# Altium PCB rgb_pcb.PcbDoc
Units mil, origin at the board's own origin, x right, y up, seen from the top; angles counter-clockwise.
Board outline 3890 x 2150 mil, 2 copper layers (Top Layer, Bottom Layer); 31 components, 23 nets, 101 pads, 0 vias.
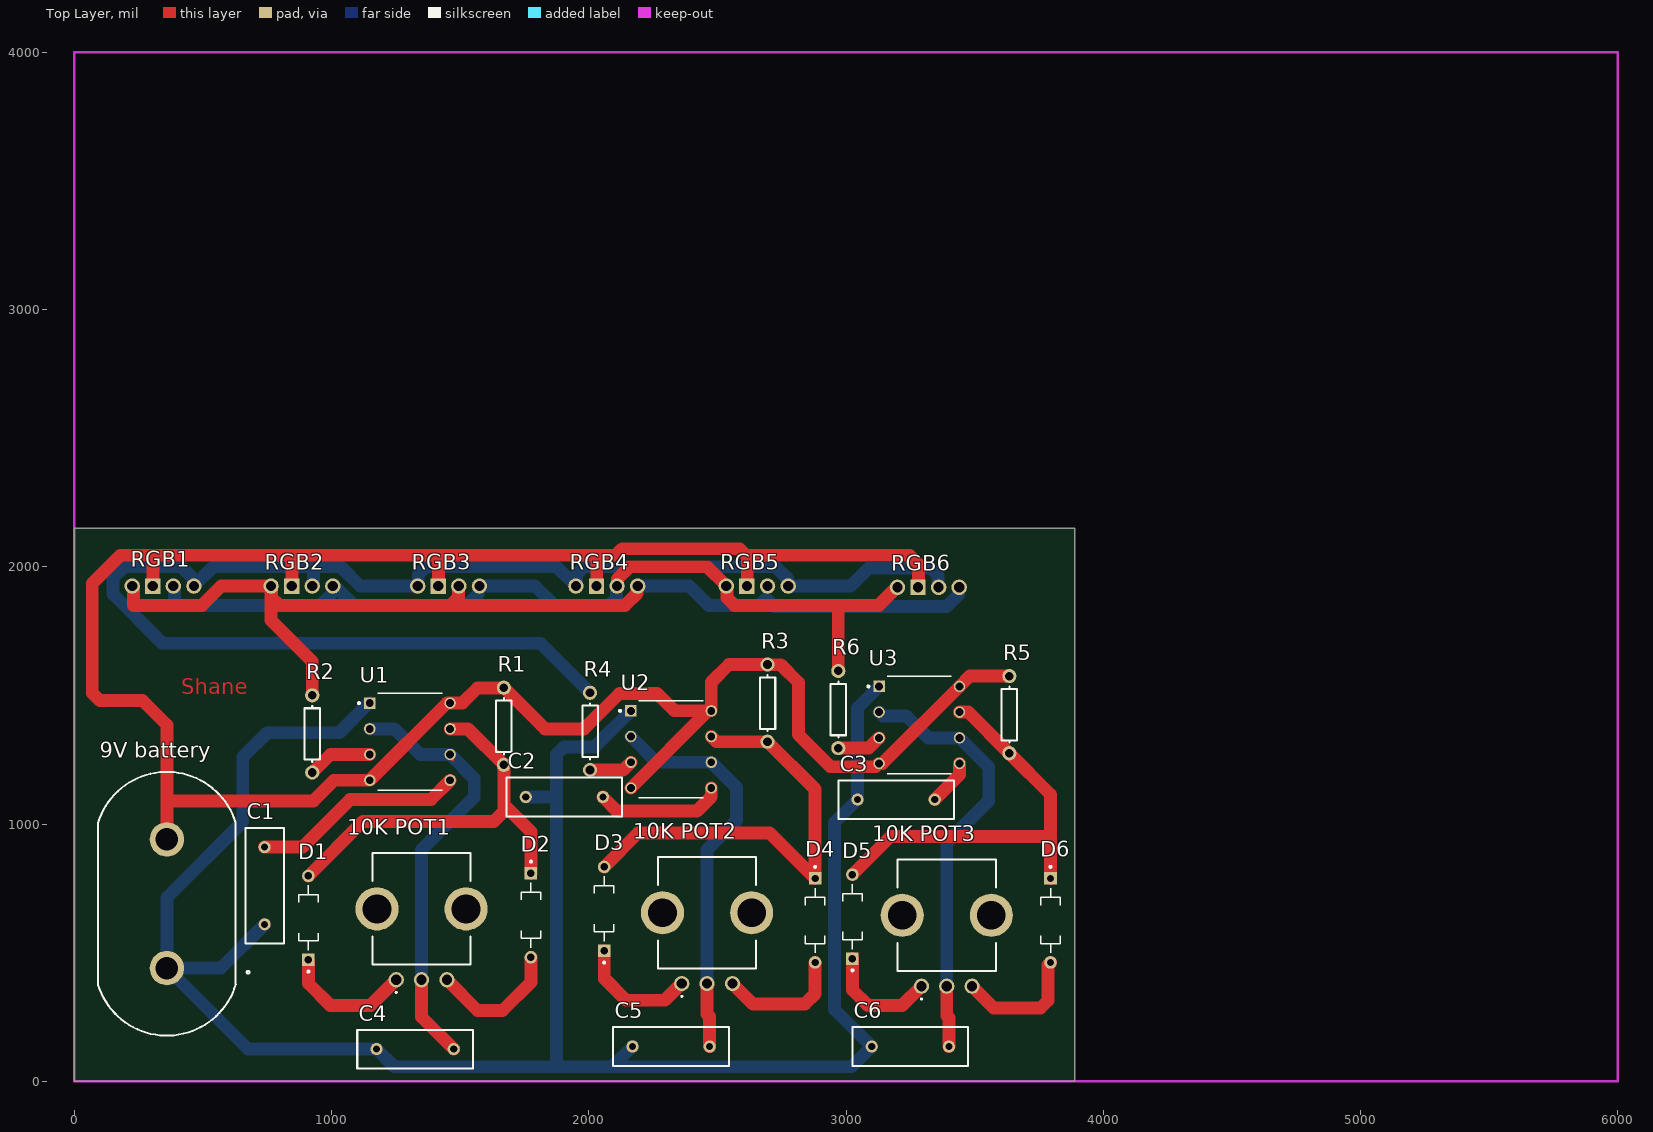
[diagram p0: Top Layer view]
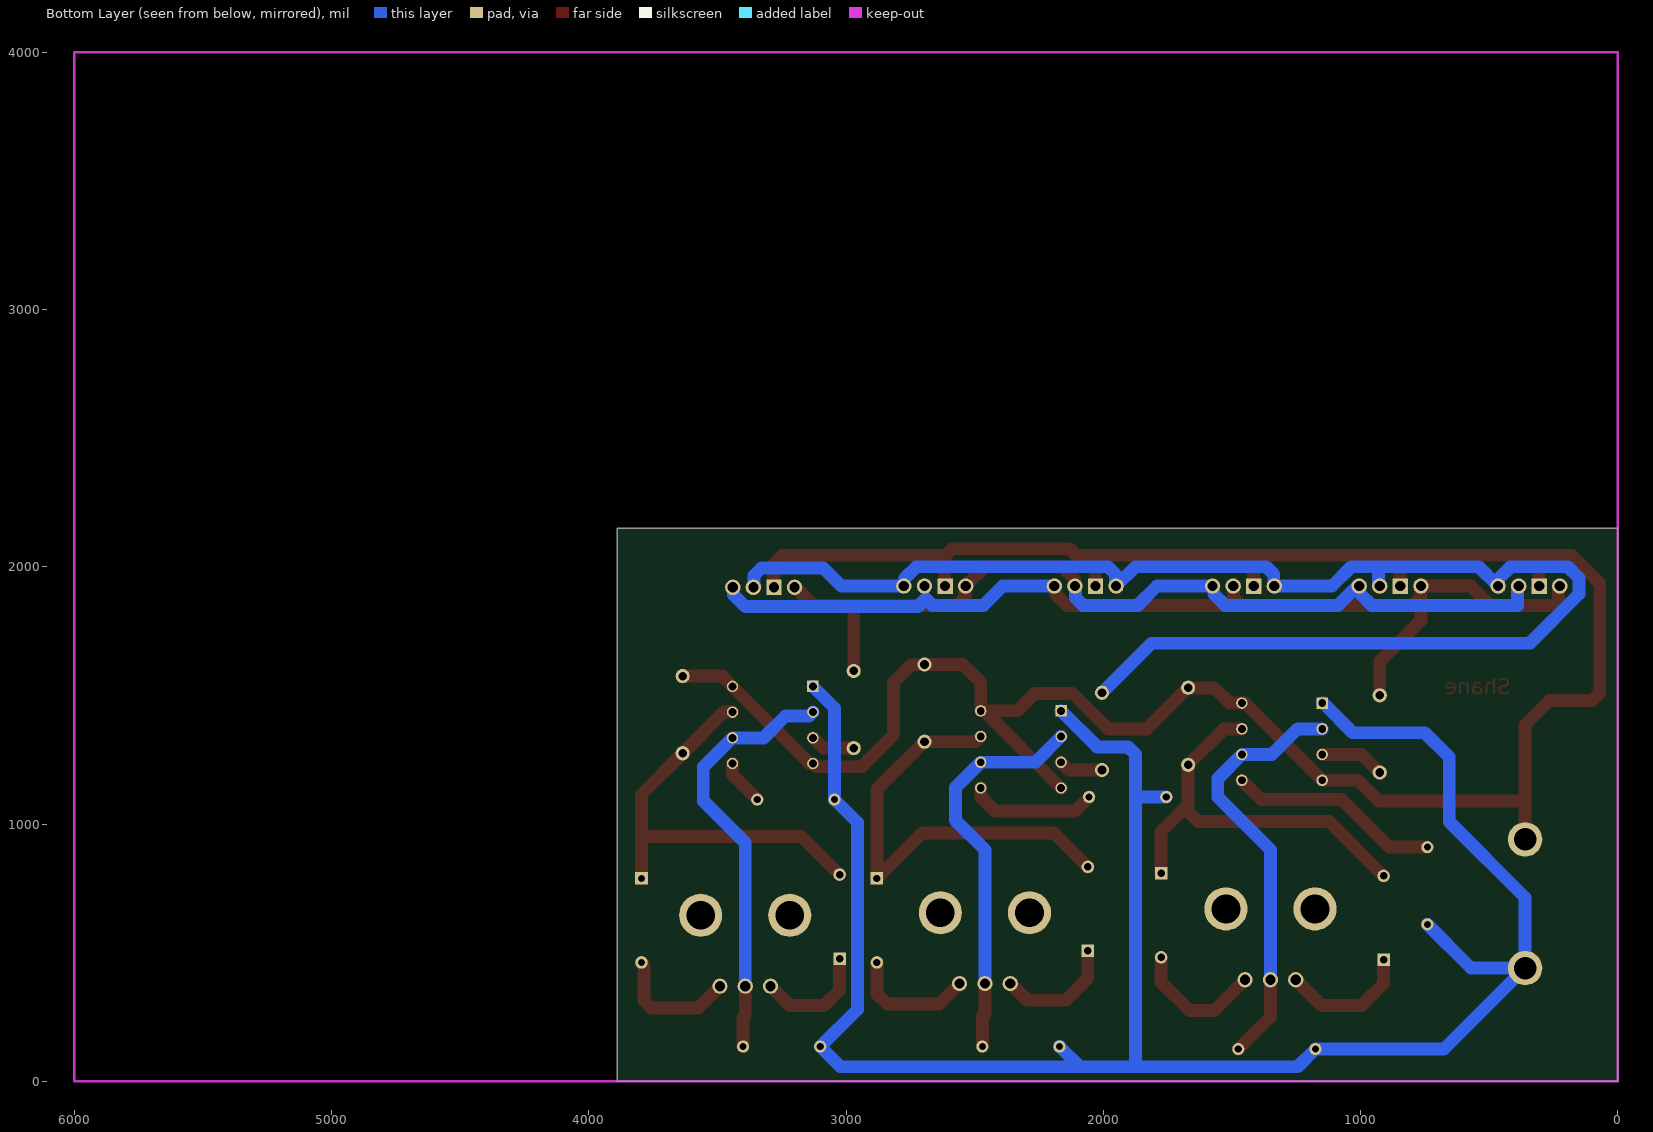
[diagram p1: Bottom Layer view, seen from below]

## Layer stack, top to bottom
Top Solder: solder mask 0.4, Solder Resist, Dk 3.5
Top Layer: signal copper 1.4
Dielectric 1: dielectric 12.6, FR-4, Dk 4.8
Bottom Layer: signal copper 1.4
Bottom Solder: solder mask 0.4, Solder Resist, Dk 3.5

## Board outline
0,0 3890,0 3890,2150 0,2150

## Design rules (kind name [scope] priority, off if disabled: settings)
BoardOutlineClearance [All] p1: gap=12 ignorepadtopadclearanceinfootprint=FALSE
Clearance [All] p1: gap=20 ignorepadtopadclearanceinfootprint=TRUE except(24: Arc-Via Track-Via SMDPad-Via THPad-Via Via-Via Via-Fill Via-Poly Via-Region Via-Text Via-Hole)
DiffPairsRouting [All] p1: maxlimit=10 minlimit=7 mostfreqgap=10 toplayer_minwidth=6 toplayer_maxwidth=15 toplayer_prefwidth=8 bottomlayer_minwidth=6 bottomlayer_maxwidth=15 bottomlayer_prefwidth=8 maxuncoupledlength=500
HoleSize [All] p1: absolutevalues=TRUE maxlimit=1000 minlimit=39.37 maxpercent=80.000 minpercent=20.000
HoleToHoleClearance [All] p1: gap=17 allowstackedmicrovias=TRUE
MinimumAnnularRing [All] p1: minimumring=17
PolygonConnect [All] p1: connectstyle=Relief reliefconductorwidth=10 reliefentries=4 polygonreliefangle="90 Angle" airgapwidth=10
RoutingVias [All] p1: holewidth=30 width=35 viastyle="Through Hole" minholewidth=10 minwidth=11 maxholewidth=255 maxwidth=250
SilkToSilkClearance [All] p1: silktosilkclearance=0
SolderMaskExpansion SolderMaskExpansion_1 [All] p1: expansion=4 istentingtop=FALSE
Width [All] p1: maxlimit=10000 minlimit=30 preferedwidth=50 minimp=50.000000 maximp=50.000000 favimp=50.000000
26 further rules are at their usual default settings.

## Components (designator, comment, footprint, x,y, rotation, side; value= is the part's Value field where it differs from the comment)
"9V battery" "967" 967 360,690 r90 top
"10K POT1" "PTV09A-4030F-B103" PTV09A4030FB103 1350,670 r0 top
"10K POT2" "PTV09A-4030F-B103" PTV09A4030FB103 2460,655 r0 top
"10K POT3" "PTV09A-4030F-B103" PTV09A4030FB103 3391.77,645 r0 top
C1 "Cap" RAD-0.3 740,760 r90 top value=.01uF
C2 "Cap" RAD-0.3 1905,1105 r0 top value=.01uF
C3 "Cap" RAD-0.3 3195,1095 r0 top value=.01uF
C4 "Cap" RAD-0.3 1325,125 r0 top value=.1uF
C5 "Cap" RAD-0.3 2320,135 r0 top value=.1uF
C6 "Cap" RAD-0.3 3250,135 r0 top value=.1uF
D1 "1N4148" DIOAD829W49L456D191 910,635 r90 top
D2 "1N4148" DIOAD829W49L456D191 1775,645 r270 top
D3 "1N4148" DIOAD829W49L456D191 2060,670 r90 top
D4 "1N4148" DIOAD829W49L456D191 2880,625 r270 top
D5 "1N4148" DIOAD829W49L456D191 3025,640 r90 top
D6 "1N4148" DIOAD829W49L456D191 3795,625 r270 top
R1 "Res1" AXIAL-0.3 1670,1380 r90 top value=1K
R2 "Res1" AXIAL-0.3 925,1350 r90 top value=220e
R3 "Res1" AXIAL-0.3 2695,1470 r90 top value=1K
R4 "Res1" AXIAL-0.3 2005,1360 r90 top value=220e
R5 "Res1" AXIAL-0.3 3635,1425 r90 top value=1K
R6 "Res1" AXIAL-0.3 2970,1445 r90 top value=220e
RGB1 "RGB CA" "RGB CA" 345,1925 r180 top
RGB2 "RGB CA" "RGB CA" 885,1925 r180 top
RGB3 "RGB CA" "RGB CA" 1455,1925 r180 top
RGB4 "RGB CA" "RGB CA" 2070,1925 r180 top
RGB5 "RGB CA" "RGB CA" 2655,1925 r180 top
RGB6 "RGB CA" "RGB CA" 3320,1920 r180 top
U1 "NE555P" DIP794W45P254L959H508Q8 1305,1320 r0 top
U2 "NE555P" DIP794W45P254L959H508Q8 2320,1290 r0 top
U3 "NE555P" DIP794W45P254L959H508Q8 3285,1385 r0 top

## Footprints (in the part's own frame and the unit in brackets; to place one, negate y for a bottom-side part, rotate by r counter-clockwise, add the part's x,y. Pads: shape width x height; smd on the part's side, far side on the other; paste and mask are expansions set on the pad)
967 [mm]
  round 3.4 hole 2.23: 1(-6.35,0) 2(6.35,0)
  silkscreen extent -13.02,-8.17 13.02,6.8
AXIAL-0.3 [mm] "Axial Device, Thru-Hole; 2 Leads; 0.3 in Pin Spacing"
  round 1.4 hole 0.85: 1(-3.81,0) 2(3.81,0)
  silkscreen extent -2.77,-0.76 2.77,0.76
DIOAD829W49L456D191 [mm]
  round 1.238 hole 0.73: A(4.146,0)
  rect 1.238x1.238 hole 0.73: C(-4.146,0)
  silkscreen extent -5.4,-0.96 3.2,0.96
DIP794W45P254L959H508Q8 [mm]
  rect 1.13x1.13 hole 0.78: 1(-3.97,3.81)
  round 1.13 hole 0.78: 2(-3.97,1.27) 3(-3.97,-1.27) 4(-3.97,-3.81) 5(3.97,-3.81) 6(3.97,-1.27) 7(3.97,1.27) 8(3.97,3.81)
  silkscreen extent -5.13,-4.79 3.17,4.79
PTV09A4030FB103 [mm]
  round 1.5 hole 1: 1(-2.5,-7) 2(0,-7) 3(2.5,-7)
  round 4.26 hole 2.84: MH1(-4.4,0) MH2(4.4,0)
  silkscreen extent -4.85,-8.3 4.85,5.5, body extent -5.71,-7.4 5.72,5.5, height 30.6
RAD-0.3 [mm] "Radial Cap, Thru-Hole; 2 Leads; 0.3 in Pin Spacing"
  round 1.2 hole 0.7: 1(-3.81,0) 2(3.81,0)
  silkscreen extent -5.71,-1.91 5.71,1.91
"RGB CA" [mil]
  rect 60x60 hole 40: a(40,0)
  round 60 hole 40: b(-40,0) g(-120,0) r(120,0)

## Part data
"9V battery": "Undefined or Miscellaneous", Manufacturer_Name="Keystone Electronics", Mouser2 Part Number=534-967, Datasheet Link=https://componentsearchengine.com//967.pdf, Manufacturer_Part_Number=967, Mouser2 Price/Stock=https://www.mouser.com/Search/Refine.aspx?Keyword=534-967
"10K POT1" "10K POT2" "10K POT3": "Variable Resistor", Manufacturer_Name=Bourns, Mouser2 Part Number=652-PTV09A4030FB103, Datasheet Link=https://componentsearchengine.com//PTV09A-4030F-B103.pdf, Height=30.5mm, Manufacturer_Part_Number=PTV09A-4030F-B103, Mouser2 Price/Stock=https://www.mouser.com/Search/Refine.aspx?Keyword=652-PTV09A4030FB103
C1 C2 C3 C4 C5 C6: "Capacitor", LatestRevisionDate=17-Jul-2002, LatestRevisionNote="Re-released for DXP Platform.", PackageDescription="Radial Cap, Thru-Hole; 2 Leads; 0.3 in Pin Spacing", PackageReference=RAD-0.3, Published=8-Jun-2000, Publisher="Altium Limited"
D1 D2 D3 D4 D5 D6: "DIODE FAST SIGNAL 500MA/100V", Package="DO-35 Fairchild Semiconductor", Availability=Unavailable, MF="MICROSS/On Semiconductor", MP=1N4148, Price=None, SnapEDA_Link=https://www.snapeda.com/parts/1N4148/MICROSS/On%20Semiconductor/view-part/9246/?ref=snap
R1 R2 R3 R4 R5 R6: "Resistor", LatestRevisionDate=17-Jul-2002, LatestRevisionNote="Re-released for DXP Platform.", PackageDescription="Axial Device, Thru-Hole; 2 Leads; 0.3 in Pin Spacing", PackageReference=AXIAL-0.3, Published=8-Jun-2000, Publisher="Altium Limited"
RGB1 RGB2 RGB3 RGB4 RGB5 RGB6: library part "rgb ca"
U1 U2 U3: "Single Precision Timer", Package="PDIP-8 Texas Instruments", Arrow_Electronics-Purchase-URL=https://snapeda.com/shop?store=Arrow+Electronics&id=2776400, DigiKey-Purchase-URL=https://snapeda.com/shop?store=DigiKey&id=2776400, MF="Texas Instruments", Mouser-Purchase-URL=https://snapeda.com/shop?store=Mouser&id=2776400, MP=NE555P, SnapEDA_Link=https://www.snapeda.com/parts/NE555P/Texas%20Instruments/view-part/2776400/?ref=snap, Texas_Instruments-Purchase-URL=https://snapeda.com/shop?store=Texas+Instruments&id=2776400

## Nets (pads, with @x,y where several pads share a name; then routed paths per layer and width w, separated by ;. In a path a pad name is that pad's centre, name@x,y a point inside that pad or via, vN(x,y) a via of type N, cw(c..) or ccw(c..) an arc to the next point about the centre after c; other vN are vias at no path point)
GND: "9V battery.1" C1.1 C2.1 C3.1 C4.1 C5.1 C6.1 U1.1 U2.1 U3.1 | length 8244.7
  Bottom Layer w50: C1.1 570,440 360,440 ; U1.1 1145,1470 1030,1355 750,1355 655,1260 655,1008.85 360,713.85 360,440 ; C2.1 1870,1105 1875,1110 ; U2.1 2023.7,1300 1904.29,1300 1875,1270.71 1875,1110 ; C5.1 2091.38,56.38 ; U3.1 3045,1451.3 C3.1 2955.63,1005.63 2955.63,279.37 C6.1 3021.38,56.38 2091.38,56.38 ; 360,440 675,125 C4.1 1243.62,56.38 1870,56.38 ; 1870,56.38 2091.38,56.38 ; 1870,56.38 1875,61.38 1875,1110
"Net9V battery_2": "9V battery.2" R1.2 R3.2 R5.2 RGB1.a RGB2.a RGB3.a RGB4.a RGB5.a RGB6.a U1.4 U1.8 U2.4 U2.8 U3.4 U3.8 | length 9798.5
  Top Layer w50: RGB1.a@306.29,1926.29 306.29,2045 ; 360,940 360,1100 ; RGB2.a@846.29,1926.29 846.29,2040 841.29,2045 ; RGB3.a@1416.29,1926.29 1416.29,2045 ; RGB4.a@2031.29,1926.29 2031.29,2040 2036.29,2045 ; U2.4 U2.8@2463.7,1440 ; RGB5.a@2616.29,1926.29 2616.29,2040 2611.29,2045 ; RGB6.a@3281.29,1921.29 3281.29,2010 3246.29,2045 2611.29,2045 ; R5.2 3481.3,1575 U3.8 3141.3,1235 U3.4 3127.7,1235 3115.14,1222.44 2939.95,1222.44 2815,1347.39 2815,1550 2745.98,1619.02 2695.98,1619.02 R3.2 2545,1620 2476.3,1551.3 U2.8 U2.8@2463.7,1440 ; 306.29,2045 841.29,2045 ; 306.29,2045 180,2045 70,1935 70,1509.29 99.29,1480 265,1480 360,1385 360,1100 ; 360,1100 370,1090 930,1090 1010,1170 U1.4 1448.7,1470 U1.8 1508.61,1470 1567.64,1529.02 1669.02,1529.02 R1.2 1830,1370 1981.85,1370 2119.09,1507.24 2265.94,1507.24 2333.18,1440 U2.8@2463.7,1440 ; 841.29,2045 1416.29,2045 ; 1416.29,2045 2036.29,2045 ; 2036.29,2045 2104.94,2045 2129.94,2070 2586.29,2070 2611.29,2045
"Net10K POT1_1": "10K POT1.1" D1.C | length 509.7
  Top Layer w50: D1.C 910,380 995,295 1152.17,295 1251.57,394.41
"Net10K POT1_2": "10K POT1.2" C4.2 U1.2 U1.6 | length 1700.9
  Top Layer w10: U1.6 1461.3,1260.67 1471.99,1249.98 1471.99,1248.01
  Top Layer w50: 1350,394.41 1350,250 C4.2
  Bottom Layer w50: U1.2 1245,1370 1345,1270 U1.6 1555,1176.3 1555,1105 1350,900 1350,394.41
"Net10K POT1_3": "10K POT1.3" D2.A | length 518.4
  Top Layer w50: 1448.43,394.41 1567.83,275 1665,275 1775,385 D2.A
"Net10K POT2_1": "10K POT2.1" D3.C | length 470.2
  Top Layer w50: D3.C 2060,400 2145,315 2295,315 2359.41,379.41 2361.57,379.41
"Net10K POT2_2": "10K POT2.2" C5.2 U2.2 U2.6 | length 1551.7
  Top Layer w50: 2460,379.41 2460,260.98 2470,250.98 C5.2
  Bottom Layer w50: U2.2 2263.7,1240 U2.6 2575,1141.3 2575,1015 2460,900 2460,379.41
"Net10K POT2_3": "10K POT2.3" D4.A | length 492.8
  Top Layer w50: 2558.43,379.41 2637.83,300 2840,300 2880,340 D4.A
"Net10K POT3_1": "10K POT3.1" D5.C | length 445.8
  Top Layer w50: D5.C 3025,355 3085,295 3218.94,295 3293.35,369.41
"Net10K POT3_2": "10K POT3.2" C6.2 U3.2 U3.6 | length 1672.1
  Top Layer w50: 3391.77,369.41 3391.77,255.09 3400,246.87 C6.2
  Bottom Layer w50: U3.2 3143.7,1420 3235,1420 3320,1335 U3.6 3555,1221.3 3555,1090 3391.77,926.77 3391.77,369.41
"Net10K POT3_3": "10K POT3.3" D6.A | length 493.5
  Top Layer w50: 3490.2,369.41 3574.61,285 3755.71,285 3785,314.29 3785,451.77 D6.A
NetC1_2: C1.2 U1.5 | length 829
  Top Layer w50: C1.2 887.5,910 1072.5,1095 1386.3,1095 U1.5
NetC2_2: C2.2 U2.5 | length 501.1
  Top Layer w50: C2.2 2110,1050 2420,1050 2476.3,1106.3 U2.5
NetC3_2: C3.2 U3.5 | length 179.9
  Top Layer w50: C3.2 3441.3,1191.3 U3.5
NetD1_A: D1.A D2.C R1.1 U1.7 | length 1621.7
  Top Layer w50: D1.A 1121.77,1010 1630.71,1010 1670,1049.29 1670,1075 ; U1.7 1530,1370 R1.1 1670,1075 ; D2.C 1775,970 1670,1075
NetD3_A: D3.A D4.C R3.1 U2.7 | length 1783.2
  Top Layer w50: D3.A 2191.77,965 2703.23,965 D4.C 2880,1135 R3.1 2496.3,1320 U2.7
NetD5_A: D5.A D6.C R5.1 U3.7 | length 1644.5
  Top Layer w50: D5.A 3173.39,951.61 3795,951.61 ; U3.7 3475,1435 R5.1 3795,1115 3795,951.61 ; D6.C 3795,951.61
NetR2_1: R2.1 U1.3 | length 252.7
  Top Layer w50: R2.1 926.38,1200 996.38,1270 U1.3
NetR2_2: R2.2 RGB1.r RGB2.r RGB3.b RGB4.g RGB5.b RGB6.g | length 4115.5
  Top Layer w50: RGB1.r 230,1925 230,1850 496.07,1850 571.07,1925 RGB2.r ; R2.2 925,1631.84 765,1791.84 RGB2.r ; RGB3.b 1493.09,1923.09 1493.09,1879.45 1463.64,1850 ; RGB4.g 2188.09,1923.09 2188.09,1897.02 2141.07,1850 1463.64,1850 ; RGB6.g@3439.37,1918.09 RGB6.g@3440,1918.71 ; RGB2.r 766.91,1923.09 766.91,1879.45 796.36,1850 1463.64,1850
  Bottom Layer w50: RGB3.b RGB3.b@1500,1925 ; RGB4.g@2185,1925 RGB4.g 2390.67,1925 2465.67,1850 2663.64,1850 2690,1876.36 2721.36,1845 3391.07,1845 3438.09,1892.02 3438.09,1918.09 RGB6.g
NetR4_1: R4.1 U2.3 | length 171.1
  Top Layer w50: R4.1 2133.7,1210 U2.3
NetR4_2: R4.2 RGB1.g RGB2.b RGB3.r RGB4.r RGB5.g RGB6.b | length 5743.7
  Top Layer w50: RGB2.b@924.37,1923.09 RGB2.b@925,1923.71 ; RGB6.b@3358.22,1916.93 RGB6.b@3360,1918.71
  Bottom Layer w50: RGB2.b 930,1925 930,2000 ; R4.2 1812.54,1702.46 341.48,1702.46 150,1893.93 150,1956.07 193.93,2000 416.07,2000 463.09,1952.98 463.09,1926.91 RGB1.g 540,2000 930,2000 ; RGB5.g@2773.09,1952.98 2726.07,2000 1981.36,2000 1951.91,1970.55 1951.91,1926.91 RGB4.r 1875,2000 1366.36,2000 1336.91,1970.55 1336.91,1926.91 RGB3.r 1111.07,1925 1036.07,2000 930,2000 ; RGB5.g 3018.17,1925 3088.17,1995 3328.64,1995 3358.09,1965.55 3358.09,1921.91 RGB6.b
NetR6_1: R6.1 U3.3 | length 175.3
  Top Layer w50: R6.1 3088.7,1295 U3.3
NetR6_2: R6.2 RGB1.b RGB2.g RGB3.g RGB4.b RGB5.r RGB6.r | length 3458.2
  Top Layer w50: RGB4.b 2111.91,1926.91 2111.91,1952.98 2158.93,2000 2460,2000 RGB5.r 2536.91,1923.09 2536.91,1879.45 2566.36,1850 2970,1850 ; R6.2 2970,1850 ; RGB6.r 3197.29,1920 3127.29,1850 2970,1850
  Bottom Layer w50: RGB1.b 390,1925 390,1850 956.07,1850 1000,1893.93 ; RGB2.g 1012.07,1925 1087.07,1850 1526.07,1850 1570,1893.93 ; RGB3.g 1790.67,1925 1865.67,1850 2078.64,1850 2108.09,1879.45 2108.09,1923.09 RGB4.b RGB4.b@2115,1925
pads on no net: "10K POT1.MH1" "10K POT1.MH2" "10K POT2.MH1" "10K POT2.MH2" "10K POT3.MH1" "10K POT3.MH2"

## Keep-outs
Keep-Out Layer:
  lines w10: 0,0 6000,0 6000,4000 0,4000 0,0

## Other copper
Top Layer:
  text "Shane" at 415,1505 h60